# Altium PCB PCB2.PcbDoc
Units mil, origin at the board's own origin, x right, y up, seen from the top; angles counter-clockwise.
Board outline 12060 x 1225 mil, 2 copper layers (Top Layer, Bottom Layer); 21 components, 42 nets, 134 pads, 85 vias.
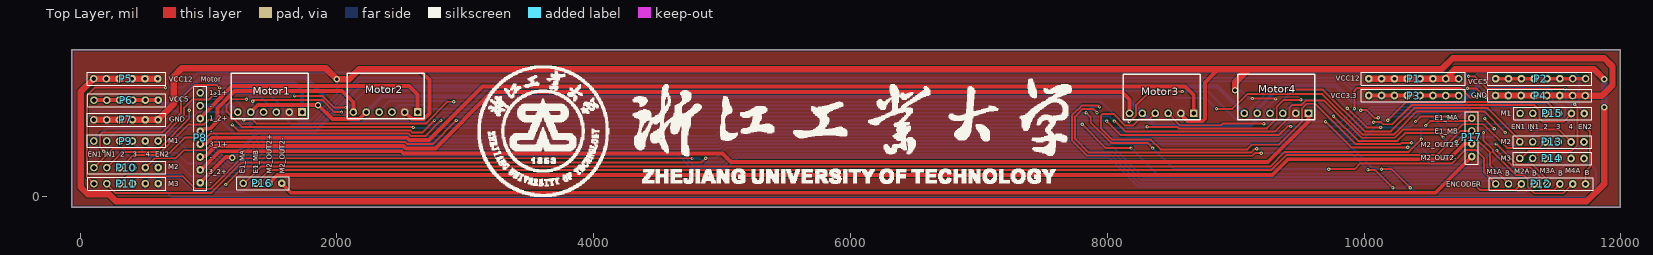
[diagram p0: Top Layer view]
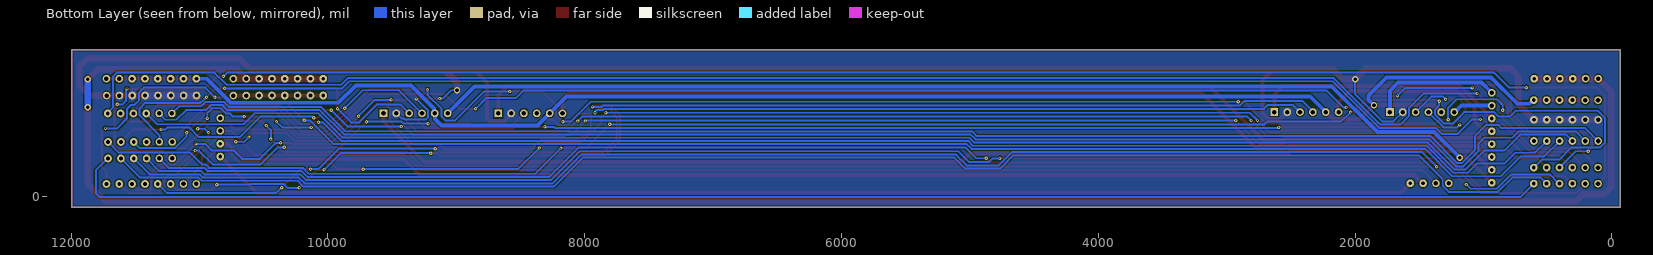
[diagram p1: Bottom Layer view, seen from below]

## Layer stack, top to bottom
Top Solder: solder mask 0.4, Solder Resist, Dk 3.5
Top Layer: signal copper 1.4
Dielectric 1: dielectric 12.6, FR-4, Dk 4.8
Bottom Layer: signal copper 1.4
Bottom Solder: solder mask 0.4, Solder Resist, Dk 3.5

## Board outline
-65,-80 -65,1145 11995,1145 11995,-80

## Design rules (kind name [scope] priority, off if disabled: settings)
Clearance [All] p1: gap=10 ignorepadtopadclearanceinfootprint=FALSE except(0: Arc-Hole Track-Hole SMDPad-Hole THPad-Hole Via-Hole Fill-Hole Poly-Hole Region-Hole Text-Hole)
PolygonConnect [All] p1: thpad.connectstyle=Direct thpad.reliefconductorwidth=10 thpad.reliefentries=4 thpad.polygonreliefangle="90 Angle" thpad.airgapwidth=10 smdpad.connectstyle=Relief smdpad.reliefconductorwidth=10 smdpad.reliefentries=4 smdpad.polygonreliefangle="90 Angle" smdpad.airgapwidth=10 via.connectstyle=Direct via.reliefconductorwidth=10 via.reliefentries=4 via.polygonreliefangle="90 Angle" via.airgapwidth=10
RoutingVias [All] p1: holewidth=28 width=50 viastyle="Through Hole" minholewidth=28 minwidth=50 maxholewidth=28 maxwidth=50
SolderMaskExpansion [All] p1: expansion=4 istentingtop=FALSE
Width [All] p1: maxlimit=50 minlimit=5 preferedwidth=10 minimp=50.000000 maximp=50.000000 favimp=50.000000
30 further rules are at their usual default settings.

## Components (designator, comment, footprint, x,y, rotation, side; value= is the part's Value field where it differs from the comment)
Motor1 "H2.54X6" Header6 2118.51,-291.97 r180 top
Motor2 "H2.54X6" Header6 3018.51,-291.97 r180 top
Motor3 "H2.54X6" Header6 9063.5,-302.12 r180 top
Motor4 "H2.54X6" Header6 9957.53,-301.94 r180 top
P1 "HEADER_8" HDR1X8 10736.19,920 r180 top
P2 "HEADER_8" HDR1X8 11725,920 r180 top
P3 "HEADER_8" HDR1X8 10736.19,788.74 r180 top
P4 "HEADER_8" HDR1X8 11723.68,788.74 r180 top
P5 "HEADER_6" HDR1X6 105,920 r0 top
P6 "HEADER_6" HDR1X6 107.81,753.16 r0 top
P7 "HEADER_6" HDR1X6 107.1,599.84 r0 top
P8 "HEADER_8" HDR1X8 935,810 r270 top
P9 "HEADER_6" HDR1X6 107.1,434.56 r0 top
P10 "HEADER_6" HDR1X6 107.81,227.64 r0 top
P11 "HEADER_6" HDR1X6 107.81,102.64 r0 top
P12 "HEADER_8" HDR1X8 11025,100 r0 top
P13 "HEADER_6" HDR1X6 11212.45,427.33 r0 top
P14 "HEADER_6" HDR1X6 11212.45,298.85 r0 top
P15 "HEADER_6" HDR1X6 11215,649.3 r0 top
P16 "HEADER_4" HDR1X4 1270,105 r0 top
P17 "HEADER_4" HDR1X4 10838.65,613.13 r270 top

## Footprints (in the part's own frame and the unit in brackets; to place one, negate y for a bottom-side part, rotate by r counter-clockwise, add the part's x,y. Pads: shape width x height; smd on the part's side, far side on the other; paste and mask are expansions set on the pad)
HDR1X4 [mil]
  round 59.06 hole 35.43: 1(0,0) 2(100,0)
  round 60 hole 30: 3(200,0) 4(300,0)
  silkscreen extent -50,-50 360,50
HDR1X6 [mil]
  round 59.06 hole 35.43: 1(0,0) 2(100,0)
  round 60 hole 30: 3(200,0) 4(300,0) 5(400,0) 6(500,0)
  silkscreen extent -50,-50 560,50
HDR1X8 [mil]
  round 59.06 hole 35.43: 1(0,0) 2(100,0)
  round 60 hole 30: 3(200,0) 4(300,0) 5(400,0) 6(500,0) 7(600,0) 8(700,0)
  silkscreen extent -50,-50 760,50
Header6 [mil]
  rect 60x60 hole 36: 1(390,-951.85)
  round 60 hole 36: 2(490,-951.85) 3(590,-951.85) 4(690,-951.85) 5(790,-951.85) 6(890,-951.85)
  silkscreen extent 340,-1255 940,-901

## Via types
v1: diameter 25.59, hole 11.81, Top Layer to Bottom Layer, 79 vias
v2: diameter 50, hole 28, Top Layer to Bottom Layer, 6 vias

## Nets (pads, with @x,y where several pads share a name; then routed paths per layer and width w, separated by ;. In a path a pad name is that pad's centre, name@x,y a point inside that pad or via, vN(x,y) a via of type N, cw(c..) or ccw(c..) an arc to the next point about the centre after c; other vN are vias at no path point)
E1_MA: P16.1 P17.1 | length 9821.8
  Top Layer w15: P16.1 1277.84,105 1407.84,235 9268.68,235 9383.68,350 10347.84,350 10445,447.16 v1(10445,450) ; v1(10480,555) 10515,590 10807.83,590 10830.96,613.13 P17.1
  Bottom Layer w15: v1(10445,450) 10445,520 v1(10480,555)
E1_MB: P16.2 P17.2 | length 9637.7
  Top Layer w15: P16.2 1475,210 9279.04,210 9394.04,325 10565,325 10753.13,513.13 P17.2
GND: Motor1.2 Motor2.2 Motor3.2 Motor4.2 P4.1 P4.2 P4.3 P4.4 P4.5 P4.6 P4.7 P4.8 P7.1 P7.2 P7.3 P7.4 P7.5 P7.6 | length 16192.4
  Top Layer w15: v1(9130,765) 9302.51,765 9303.2,764.31 9310.69,764.31 v1(9312.72,762.28)
  Top Layer w30: Motor2.2 2583.51,604.88 2674.88,604.88 2720,650 2720,910 2660,970 ; Motor3.2 8573.5,641.62 8588.5,626.62 8588.5,626.5 8625,590 8742.43,590 8760,607.57 8760,890 8865,995
  Top Layer w50: P7.1 P7.2 P7.3 P7.4 P7.5 P7.6 730,722.74 730,940 790,1000 1915,1000 v2(2000,915) 2095,915 2175,995 8865,995 9100,995 ; v2(8995,830) 8995,890 9100,995 ; P4.8 P4.7 P4.6 P4.5 P4.4 P4.3 P4.2 P4.1 11725.41,787.01 11852.72,787.01 11935,869.29 11935,1015 11870,1080 10690,1080 10605,995 9100,995
  Bottom Layer w15: Motor1.2 1701.01,587.38 1787.38,587.38 2000,800 v2(2000,915) ; v2(8995,830) 9040,830 9105,765 v1(9130,765) ; v1(9312.72,762.28) 9220.03,669.59 9220.03,618.79 9236.4,602.41 9387.2,602.41 9402.53,602.41 9410.12,610 9427.61,610 Motor4.2
  Bottom Layer w50: P4.1 P4.1@11725.41,790.47
M1_EA: Motor1.4 P12.1 | length 10673.7
  Top Layer w15: v1(1185,560) 1227.5,517.5 2569.35,517.5 2586.85,500 2665,500 v1(2760,595) ; v1(7835,654.7) 7871.18,618.52 7871.18,578.46 8029.64,420 8315,420 v1(8355,380) ; v1(9725,215) 9926.86,215 9971.86,260 10685,260 10789.89,364.89 10870.11,364.89 10935.32,299.68 10935.32,189.68 P12.1
  Bottom Layer w15: v1(1185,560) 1205,540 1311.16,540 1428.51,657.35 Motor1.4 ; v1(2760,595) 2819.7,654.7 v1(7835,654.7) ; v1(8355,380) 8355.59,380 8520.59,215 v1(9725,215)
M1_EB: Motor1.3 P12.2 | length 11117.6
  Top Layer w15: v1(1295,760) 1294.52,759.52 1185.48,759.52 1140,714.04 1140,665 1200.43,604.57 1260,545 2590,545 v1(2595,540) ; v1(8310,545) 8542.88,545 8555.38,532.5 9242.5,532.5 9320,610 9320,700 9375,755 9506.8,755 v1(9508.4,756.6) ; v1(9761.42,626.42) 9953.14,434.7 10259.7,434.7 10320.3,495.3 10584.7,495.3 v1(10615,465) ; v1(10718.88,428.88) 10751.48,461.48 10863.52,461.48 10979.7,345.3 10979.7,245.3 P12.2
  Bottom Layer w15: v1(1295,760) 1315,780 1408.4,780 Motor1.3 ; v1(2595,540) 2600.3,534.7 8120.08,534.7 8120.67,535.3 8230.3,535.3 8240,545 v1(8310,545) ; v1(9508.4,756.6) 9510,755 9635,755 9760,630 9760,627.84 v1(9761.42,626.42) ; v1(10615,465) 10651.12,428.88 v1(10718.88,428.88)
M1_EN1: P9.1 P15.1 | length 11582.9
  Bottom Layer w15: P9.1 207.55,535 860,535 885,560 980,560 1065,475 1065,364.9 1167.4,262.5 1202.6,262.5 1412.49,472.38 4945.9,472.38 4983.22,509.7 8130.44,509.7 8131.03,510.3 9864.23,510.3 10054.52,700.59 10770.59,700.59 10771.71,701.71 10772.23,701.71 10810.52,740 10950,740 10985,705 11159.3,705 P15.1
M1_EN2: P9.6 P15.6 | length 11918.6
  Top Layer w15: P9.6 810,637.45 810,695 872.03,757.03 1002.03,757.03 v1(1050,805)
  Bottom Layer w15: v1(1050,805) 1465,805 1581.01,688.99 1581.01,628.99 1647.62,562.38 1802.38,562.38 2165,925 9845,925 9897.5,872.5 10789.66,872.5 10884.66,967.5 11644.01,967.5 11675,936.51 11675,695 11715,655 P15.6
M1_IN1: P9.2 P15.2 | length 11553.3
  Bottom Layer w15: P9.2 282.55,510 725.36,510 775.36,460 995,460 1040,415 1040,354.54 1157.04,237.5 1212.96,237.5 1422.84,447.38 4956.26,447.38 4993.58,484.7 8140.79,484.7 8141.39,485.3 9874.58,485.3 10064.88,675.59 10785.59,675.59 10825,715 10910,715 10950,675 11105,675 11180,600 11265.7,600 P15.2
M1_IN2: P9.3 P15.3 | length 11494.7
  Bottom Layer w15: P9.3 307.1,437.1 355,485 715,485 840,360 995,360 1142.5,212.5 1223.31,212.5 1433.2,422.38 4966.61,422.38 5003.93,459.7 8151.15,459.7 8151.74,460.3 9884.94,460.3 10075.24,650.59 10569.41,650.59 10654.7,565.3 11331,565.3 P15.3
M1_IN3: P9.4 P15.4 | length 11499.4
  Top Layer w15: v1(10185,595.3) 10185.59,595.3 10330.3,740 11424.3,740 P15.4
  Bottom Layer w15: P9.4 526.66,315 710,315 865,160 1241.53,160 1453.91,372.38 4987.32,372.38 5024.64,409.7 8171.86,409.7 8172.45,410.3 9955.3,410.3 10137.68,592.68 10174.89,592.68 10175.49,593.27 10182.97,593.27 v1(10185,595.3)
M1_IN4: P9.5 P15.5 | length 11563.4
  Top Layer w15: v1(10073.64,581.36) 10131.49,581.36 10147.84,565 10220,565 10370,715 11325,715 11365,675 11365,610 11390,585 11555,585 11615,645 P15.5
  Bottom Layer w15: P9.5 598.68,342.97 752.03,342.97 835,260 1050,260 1122.5,187.5 1233.67,187.5 1443.55,397.38 4976.97,397.38 5014.29,434.7 8161.51,434.7 8162.1,435.3 9895.3,435.3 10040,580 10072.28,580 v1(10073.64,581.36)
M1_OUT1+: Motor1.1 P8.1 | length 1019.6
  Bottom Layer w30: P8.1 1015,890 1665,890 1728.51,826.49 Motor1.1
M1_OUT1-: Motor1.6 P8.2 | length 314.3
  Bottom Layer w30: P8.2 1172.56,710 1222.68,659.88 Motor1.6
M1_OUT2+: Motor2.1 P8.3 | length 1965.5
  Top Layer w30: P8.3 935,615 1183.09,863.09 2561.91,863.09 2628.51,796.49 Motor2.1
M1_OUT2-: Motor2.6 P8.4 | length 1494.3
  Top Layer w30: P8.4 943.12,510 963.12,530 1010,530 1070,590 1070,690 1203.09,823.09 2041.91,823.09 2128.51,736.49 Motor2.6
M2_EA: Motor2.4 P12.3 | length 9838.4
  Top Layer w15: v1(7940,700) 7929.41,710.59 7800.24,710.59 7725,635.36 7725,440 7845,320 9130,320 9150,340 9199.7,340 v1(9200,340.3) ; v1(10030,210) 10085,210 v1(10225,70) ; v1(10865,94.7) 10906.73,52.97 11177.97,52.97 P12.3
  Bottom Layer w15: Motor2.4 2328.51,666.01 2410,747.5 2859.95,747.5 2897.45,710 7857.9,710 7867.9,700 v1(7940,700) ; v1(9200,340.3) 9200.3,340 9900,340 v1(10030,210) ; v1(10225,70) 10315,70 10345,100 10600.92,100 10606.21,94.7 v1(10865,94.7)
M2_EB: Motor2.3 P12.4 | length 9722.1
  Top Layer w15: v1(7920,655) 7890,685 7810,685 7750,625 7750,450.36 7855.36,345 9119.55,345 9147.52,372.97 9162.97,372.97 v1(9165,375) ; v1(10135,215) 10214.7,215 v1(10360,69.7)
  Bottom Layer w15: Motor2.3 2483.63,715 2680,715 2710,685 7847.55,685 7857.55,675 7910,675 v1@7921.54,663.46 ; v1(9165,375) 9915,375 10075,215 v1(10135,215) ; v1(10360,69.7) 10362.87,69.7 10402.57,30 11255,30 P12.4
M2_EN1: P10.1 P13.1 | length 12378.9
  Top Layer w15: P10.1 255.17,375 614.72,375 850,610.28 v1(850,673.45) ; v1(1275,600) 1343.73,600 1373.73,570 2559.36,570 2559.66,570.3 2607.55,570.3 2607.84,570 2690,570 2860.3,740.3 v1(2910,740.3) ; v1(8170,585) 8175.94,585 8225,634.06 8225,715 8330,820 v1(8585,820) ; v1(9225,835) 9680,835 10005.3,509.7 10209.35,509.7 10389.64,690 10965,690 11198.27,456.73 11198.27,453.43 11212.45,439.25 P13.1
  Bottom Layer w15: v1(850,673.45) 850,715 895,760 1208.27,760 1276.01,692.26 1276.01,601.01 v1(1275,600) ; v1(2910,740.3) 7954.7,740.3 8110,585 v1(8170,585) ; v1(8585,820) 8785,820 9010,595 9085,595 9115,625 9115,630.21 ; 9115.03,630.24 9115.03,685.03 9225,795 v1(9225,835)
M2_EN2: P10.6 P13.6 | length 13101.6
  Top Layer w15: v1(1345,745) 1347.87,745 1357.87,755 1884.64,755 1979.64,660 v1(2035,660) ; v1(7805,565) 7990,380 v1(8185,380)
  Bottom Layer w15: P10.6 545.45,290 410,290 315,385 90,385 55,420 55,615 110,670 750,670 795,625 882.82,625 917.82,660 1150,660 1240.3,569.7 1305.51,569.7 1376.01,640.21 1376.01,681.77 1345,712.79 v1(1345,745) ; v1(2035,660) 2110,585 2685,585 2705.59,564.41 7804.41,564.41 v1(7805,565) ; v1(8185,380) 8385.3,179.7 10149.76,179.7 10195.06,225 10925.36,225 10950.36,250 10980,250 11076.35,346.35 11631.47,346.35 P13.6
M2_IN1: P10.2 P13.2 | length 12043.7
  Top Layer w15: P10.2 330.17,350 630,350 842.5,562.5 962.5,562.5 1000,600 1021.55,600 v1(1023.87,602.32) ; v1(10805,845) 10875,845 v1(10945,775)
  Bottom Layer w15: v1(1023.87,602.32) 1087.68,602.32 1200,490 1324.04,490 1371.42,537.38 1812.74,537.38 2175.36,900 9834.64,900 9889.64,845 v1(10805,845) ; v1(10945,775) 10947.87,775 10957.87,765 10960.36,765 10993.87,731.49 11423.51,731.49 11467.5,687.5 11467.5,634.62 11312.45,479.58 P13.2
M2_IN2: P10.3 P13.3 | length 11733.7
  Top Layer w15: P10.3 317.64,227.64 415,325 680,325 817.5,462.5 983.46,462.5 1013.46,492.5 2558.99,492.5 2576.49,475 2690,475 v1(2810,595) ; v1(8055,590) 8062.16,590 8144.66,507.5 9302.5,507.5 9420.03,625.03 9420.03,695.03 9440,715 9509.64,715 9544.64,750 9690,750 9980.3,459.7 10240.06,459.7 10305.06,524.7 10729.35,524.7 10769.64,565 10930,565 11114.7,380.3 11365.43,380.3 P13.3
  Bottom Layer w15: v1(2810,595) 2840,625 5409.8,625 5410.39,624.41 8020.59,624.41 v1(8055,590)
M2_IN3: P10.4 P13.4 | length 12595.5
  Top Layer w15: v1(185,354.7) 185,355 155,385 155,485 170,500 635,500 785,650 785,765 890,870 1065,870 v1(1087.5,847.5) ; v1(1670,785.3) 1670.3,785 1890,785 1980,695 v1(2070,695) ; v1(8850,685) 8975,685 9090,800 9675.36,800 9990.65,484.7 10229.7,484.7 10410,665 10935,665 v1(11100,500)
  Bottom Layer w15: v1(185,354.7) 185.3,355 280.45,355 P10.4 ; v1(1087.5,847.5) 1607.8,847.5 v1(1670,785.3) ; v1(2070,695) 2090,695 2222.5,827.5 8477.5,827.5 8535,770 8765,770 v1(8850,685) ; v1(11100,500) 11100,473.27 11193.45,379.83 11464.95,379.83 P13.4
M2_IN4: P10.5 P13.5 | length 11573.8
  Top Layer w15: P10.5 580.17,300 745,300 807.5,362.5 976.54,362.5 1041.54,427.5 2532.07,427.5 2549.57,410 2745,410 2929.7,594.7 v1(2930,594.7) ; v1(7995,590) 8102.5,482.5 9337.5,482.5 9405,550 9427.12,550 v1(9430,547.12) ; v1(9975,675) 10020.34,675 10080.34,615 v1(10110,615) ; v1(11300,525) 11514.78,525 P13.5
  Bottom Layer w15: v1(2930,594.7) 2930.59,595.3 7986.84,595.3 7992.13,590 v1(7995,590) ; v1(9430,547.12) 9847.12,547.12 v1(9975,675) ; v1(10110,615) 10112.87,615 10123.46,625.59 10524.41,625.59 10685,465 11005,465 11080,540 11248.61,540 11263.61,525 v1(11300,525)
M2_OUT2+: P16.3 P17.3 | length 9496.3
  Top Layer w30: P16.3 1535,170 9285,170 9407.5,292.5 10662.5,292.5 10783.13,413.13 P17.3
M2_OUT2-: P16.4 P17.4 | length 9415.4
  Top Layer w30: P16.4 1643.09,31.91 10557.42,31.91 P17.4
M3_EA: Motor3.4 P12.5 | length 4735.8
  Top Layer w15: Motor3.4 8326,602.23 8247.23,602.23 8199.7,554.7 8140.3,554.7 8049.3,645.7 7965.7,645.7 7950,630 7950,570.36 7950.18,570.18 7950.18,534.82 8040,445 8340,445 8415,370 9091.13,370 9126.42,405.3 9335.3,405.3 9515.03,585.03 9515.03,685.03 9555,725 9620,725 9935.3,409.7 10281.84,409.7 10292.13,420 v1(10370,420) ; v1(11028.3,411.71) 11188.18,251.82 11308.53,251.82 11416.39,143.97 11416.39,108.61 P12.5
  Bottom Layer w15: v1(10370,420) 10405,420 10530,295 10668.22,295 10733.86,360.63 10905.63,360.63 10956.71,411.71 v1(11028.3,411.71)
M3_EB: Motor3.3 P12.6 | length 3482.5
  Top Layer w15: Motor3.3 8565.74,557.5 8885.19,557.5 8897.69,570 v1(9220,570) ; v1(9700,585) 9900.3,384.7 10339.7,384.7 v1(10340,385) ; v1(11035,360) 11168.18,226.82 11298.18,226.82 11375,150 11375,65 11387.5,52.5 11477.5,52.5 P12.6
  Bottom Layer w15: v1(9220,570) 9410.04,570 9425.04,585 v1(9700,585) ; v1(10340,385) 10390.3,385 10525.3,250 10895,250 11005,360 v1(11035,360)
M3_EN1: P11.1 P14.1 | length 13339.9
  Top Layer w15: P11.1 55,155.45 55,790 115,850 v1(665,850) ; v1(10813.51,939.2) 10860.8,939.2 10960,840 v1(11565,840) ; P14.1 11223.85,298.85 11280.3,355.3 11615.3,355.3 11662.5,402.5 11662.5,697.5 v1(11640,720)
  Bottom Layer w15: v1(665,850) 800,850 917.5,967.5 10782.5,967.5 10810.8,939.2 v1(10813.51,939.2) ; v1(11565,840) 11573.24,831.76 11573.24,746.76 11600,720 v1(11640,720)
M3_EN2: P11.6 P14.6 | length 11564.4
  Bottom Layer w15: P11.6 710.45,0 11780,0 11805,25 11805,210 11716.15,298.85 P14.6
M3_IN1: P11.2 P14.2 | length 11440.3
  Top Layer w15: P11.2 207.81,96.84 274.5,30.14 1022.3,30.14 1259.66,267.5 4839.7,267.5 4872.2,300 v1(4872.2,300.3)
  Bottom Layer w15: v1(4872.2,300.3) 4872.5,300 4950.3,300 5035,384.7 8045.3,384.7 8275.3,154.7 10160.12,154.7 10205.42,200 10935.71,200 10960.71,225 11238.61,225 P14.2
M3_IN2: P11.3 P14.3 | length 11478
  Top Layer w15: P11.3 365.17,160 800,160 897.5,62.5 1017.5,62.5 1255,300 v1@4766.41,300
  Bottom Layer w15: v1(4766.05,298.7) 4822.61,298.7 4851.31,270 5005,270 5090,355 8039.64,355 8264.94,129.7 10170.48,129.7 10215.77,175 10962.78,175 10987.78,200 11313.61,200 P14.3
M3_IN3: P11.4 P14.4 | length 11551.2
  Top Layer w15: v1(1135,95) 1275,235 v1(1365,235)
  Bottom Layer w15: P11.4 412.64,102.64 485.14,175.14 784.86,175.14 897.5,62.5 1097.5,62.5 1130,95 v1(1135,95) ; v1(1365,235) 1477.38,347.38 4672.62,347.38 4775,245 5025,245 5097.68,317.68 5097.68,318.54 5109.14,330 8025,330 8250.3,104.7 10180.83,104.7 10226.13,150 10973.14,150 10998.14,175 11388.61,175 P14.4
M3_IN4: P11.5 P14.5 | length 11580.9
  Bottom Layer w15: P11.5 555.31,150.14 774.5,150.14 887.14,37.5 1269.01,37.5 1317.03,85.52 1317.03,137.03 1502.38,322.38 4662.26,322.38 4764.64,220 5035.36,220 5120.36,305 8014.64,305 8239.94,79.7 10191.19,79.7 10236.48,125 10983.49,125 11008.49,150 11463.61,150 P14.5
M3_OUT1+: Motor3.1 P8.5 | length 8110
  Top Layer w30: P8.5 940.74,415.74 982.66,415.74 1026.92,460 2545.53,460 2563.03,442.5 2717.5,442.5 3135,860 8605.81,860 8673.5,792.31 Motor3.1
M3_OUT1-: Motor3.6 P8.6 | length 7593.2
  Top Layer w30: P8.6 940.53,315.53 975.53,315.53 1055,395 2518.61,395 2536.11,377.5 2767.5,377.5 3205,815 8115,815 8173.5,756.5 Motor3.6
M3_OUT2+: Motor4.1 P8.7 | length 8922.2
  Top Layer w30: P8.7 940,210 1085,355 2502.04,355 2519.54,337.5 3760.43,337.5 3761.02,338.09 5001.91,338.09 5070,270 9250,270 9567.53,587.53 Motor4.1
M3_OUT2-: Motor4.6 P8.8 | length 8533.4
  Top Layer w30: P8.8 1133.83,308.83 1181.17,308.83 v2(1185,305)
  Bottom Layer w30: v2(1185,305) 1384.88,504.88 1826.2,504.88 2181.32,860 8857.44,860 Motor4.6
M4_EA: Motor4.4 P12.7 | length 3193.9
  Top Layer w15: v1(9870,690) 10020,540 v1(10130,540) ; v1(10401.11,586.11) 10440,625 v1(10651.15,625) ; v1(10930,500) 10930,440 11004.7,365.3 11004.7,347.45 11182.16,170 11240,170 11275,135 11275,78.91 11326.41,27.5 11552.5,27.5 P12.7 ; v1(10940,610) 10940,607.13 10945.3,601.84 10945.3,599.7 v1(11015,530)
  Bottom Layer w15: Motor4.4 9447.61,830 9730,830 v1(9870,690) ; v1(10130,540) 10355,540 v1(10401.11,586.11) ; v1(10651.15,625) 10739.41,625 10764.41,650 10795,650 10795.59,650.59 10795.95,650.59 10835.18,689.82 10899.82,689.82 10940,649.64 v1(10940,610) v1@10940,609.32 ; v1(10930,500) 10960,530 v1(11015,530)
M4_EB: Motor4.3 P12.8 | length 3374.8
  Top Layer w15: v1(9924.94,684.94) 9924.94,824.94 9947.5,847.5 10752.5,847.5 10825,775 v1(10880,775) ; P12.8 11725,197.87 11759.95,232.83 11759.95,505.05 v1(11732.5,532.5)
  Bottom Layer w15: Motor4.3 9437.61,720 9615,720 9754.95,580.05 9820.05,580.05 v1(9924.94,684.94) ; v1(10880,775) 10955,850 11435,850 11471.18,813.82 11471.18,753.82 11510,715 11535,715 11565,685 11565,610 11642.5,532.5 v1(11732.5,532.5)
VCC3.3: P3.1 P3.2 P3.3 P3.4 P3.5 P3.6 P3.7 P3.8 | length 700
  Top Layer w30: P3.8 P3.7 P3.6 P3.5 P3.4 P3.3 P3.2 P3.1
VCC5: Motor1.5 Motor2.5 Motor3.5 Motor4.5 P2.1 P2.2 P2.3 P2.4 P2.5 P2.6 P2.7 P2.8 P6.1 P6.2 P6.3 P6.4 P6.5 P6.6 | length 12969.9
  Top Layer w30: P6.1 P6.2 P6.3 P6.4 P6.5 P6.6 ; Motor1.5 1383.63,715 1849.9,715 v2(1852.4,712.5) ; v2@1855,715 1965.12,604.88 2173.51,604.88 Motor2.5 ; P2.8 P2.7 P2.6 P2.5 P2.4 P2.3 P2.2 P2.1
  Bottom Layer w30: P6.6 612.22,753.16 640.38,725 735,725 940,930 1755,930 1895,790 1895,755 1855,715 1854.9,715 v2(1852.4,712.5) ; Motor2.5 2348.63,780 8143.24,780 Motor3.5 8368.24,555 9115,555 9165.69,605.69 Motor4.5@9165.69,648.08 ; Motor4.5 9173.27,655.65 9173.27,688.27 9352.5,867.5 9782.5,867.5 9916.91,733.09 10757.13,733.09 10758.25,734.21 10758.77,734.21 10944.56,920 P2.8
VCC12: P1.1 P1.2 P1.3 P1.4 P1.5 P1.6 P1.7 P1.8 P5.1 P5.2 P5.3 P5.4 P5.5 P5.6 | length 16160.9
  Top Layer w50: P5.6 P5.5 P5.4 P5.3 P5.2 P5.1 5,820 5,75 60,20 224.54,20 279.54,-35 11735,-35 11870,100 v2(11870,695.93) ; P1.8 P1.7 P1.6 P1.5 P1.4 P1.3 P1.2 ; P1.1 P1.2 ; v2(11870,915) 11790,995 10711.19,995 P1.2
  Bottom Layer w50: v2(11870,695.93) v2@11870,910

## Polygon pours and split planes (outlines as drawn)
GND on Top Layer "GND_L01_P004" (solid, pour order 4): 11995,-80 11995,1145 -65,1145 -65,-80
no net on Top Layer "NONET_L01_P001" (solid, pour order 1): -65,-80
GND on Bottom Layer "GND_L02_P005" (solid, pour order 5): -65,-80 -65,1145 11995,1145 11995,-80

## Keep-outs
Keep-Out Layer:
  the board outline again, w10

## Silkscreen, mask and mechanical layers (free items; w line width, h text height)
Top Overlay:
  drawing of 3483 lines, arcs and shapes, not listed
  text "VCC12" at 9778.57,902.9 h39.37
  text "VCC12" at 690,895 h39.37
  text "Motor" at 940,895 h39.37
  text "VCC5" at 10810,875 h39.37
  text "1_1+" at 1005.24,790.71 h39.37
  text "GND" at 10836.56,770.79 h39.37
  text "VCC3.3" at 9738.82,768.25 h39.37
  text "VCC5" at 695.5,738.74 h39.37
  text "-" at 1010,685.32 h39.37
  text "M1" at 11065,630 h39.37
  text "E1_MA" at 10550,596.56 h39.37
  text "1_2+" at 1005.24,590.71 h39.37
  text "GND" at 692.79,584.06 h39.37
  text "EN1" at 11145,525 h39.37
  text "IN1" at 11275,525 h39.37
  text "2" at 11400,525 h39.37
  text "3" at 11495,525 h39.37
  text "4" at 11595,525 h39.37
  text "EN2" at 11670,525 h39.37
  text "E1_MB" at 10550,491.56 h39.37
  text "-" at 1015,490.32 h39.37
  text "M1" at 687.81,417.64 h39.37
  text "M2" at 11065,410 h39.37
  text "3_1+" at 1005.24,390.71 h39.37
  text "M2_OUT2+" at 10440,386.56 h39.37
  text "EN1" at 59.09,312.12 h39.37
  text "IN1" at 189.09,312.12 h39.37
  text "2" at 314.09,312.12 h39.37
  text "3" at 409.09,312.12 h39.37
  text "4" at 509.09,312.12 h39.37
  text "EN2" at 584.09,312.12 h39.37
  text "-" at 1010,290.32 h39.37
  text "M2_OUT2-" at 10440,286.56 h39.37
  text "M3" at 11065,280 h39.37
  text "M2" at 684.43,214.57 h39.37
  text "M3A" at 11366.5,183.65 h39.37
  text "M4A" at 11566.5,183.65 h39.37
  text "E1_MA" at 1283.44,180 h39.37 r90
  text "E1_MB" at 1388.44,180 h39.37 r90
  text "M2_OUT2+" at 1493.44,180 h39.37 r90
  text "M2_OUT2-" at 1593.44,180 h39.37 r90
  text "M2A" at 11170,180 h39.37
  text "3_2+" at 1000.24,175.71 h39.37
  text "M1A" at 10955,175 h39.37
  text "B" at 11717.81,168.15 h39.37
  text "B" at 11100,165 h39.37
  text "B" at 11310,165 h39.37
  text "B" at 11512.81,163.15 h39.37
  text "-" at 1010,95.32 h39.37
  text "M3" at 687.81,82.64 h39.37
  text "ENCODER" at 10640,80 h39.37